# Altium PCB JacdacBreadboardRingsWasherG 109 D-shaped-panel.PcbDoc
Units mm, origin at the board's own origin, x right, y up, seen from the top; angles counter-clockwise.
Board outline 72.5 x 72 mm, 2 copper layers (Top Layer, Bottom Layer), stack 1.971 mm thick; 4 components, 0 nets, 4 pads, 0 vias.
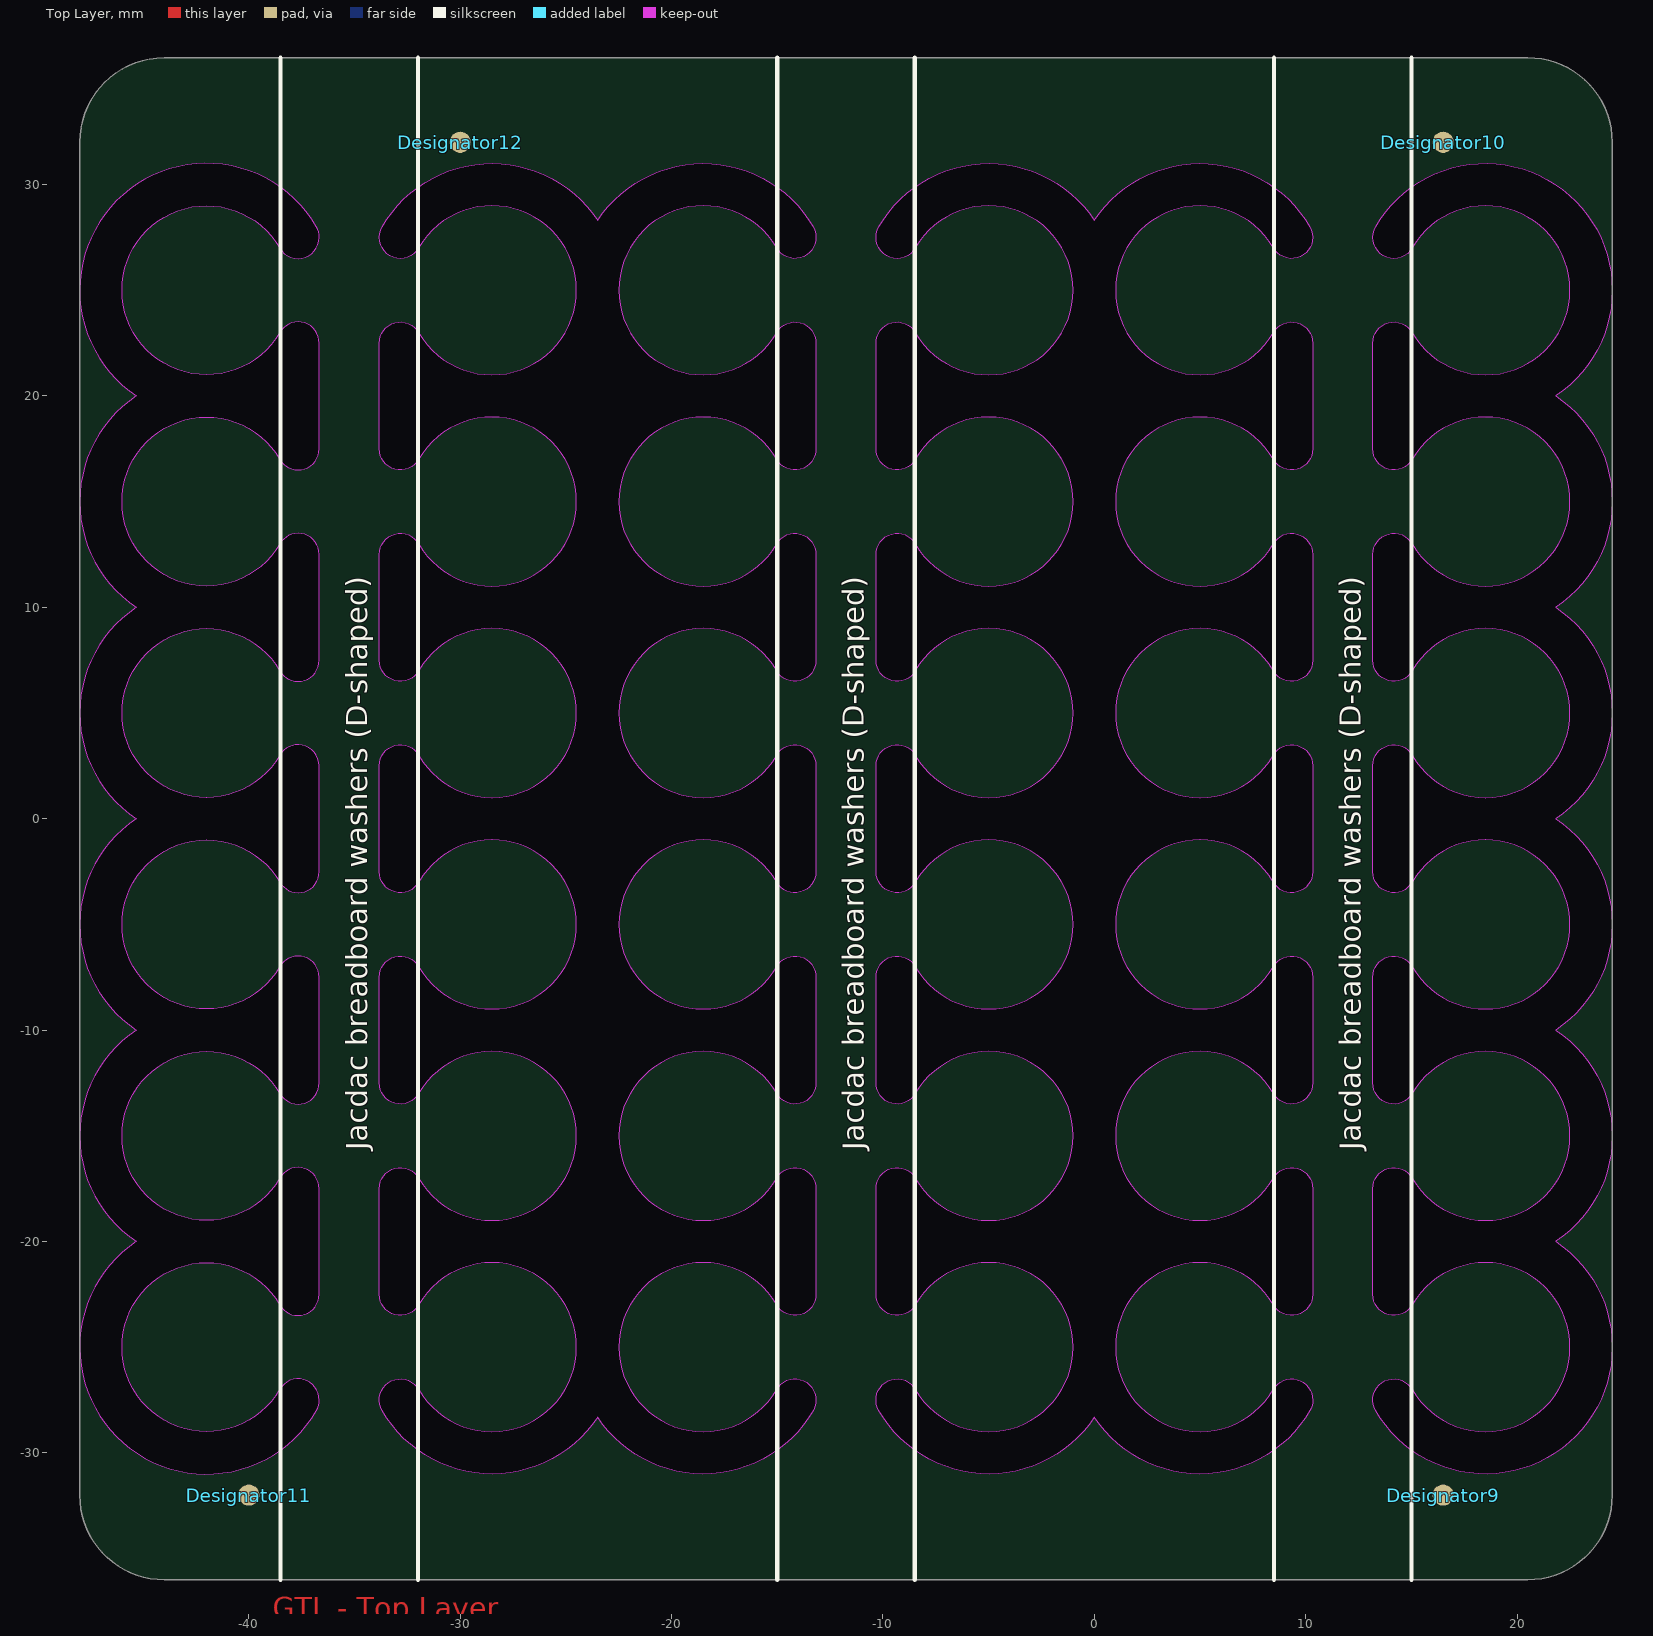
[diagram p0: Top Layer view]
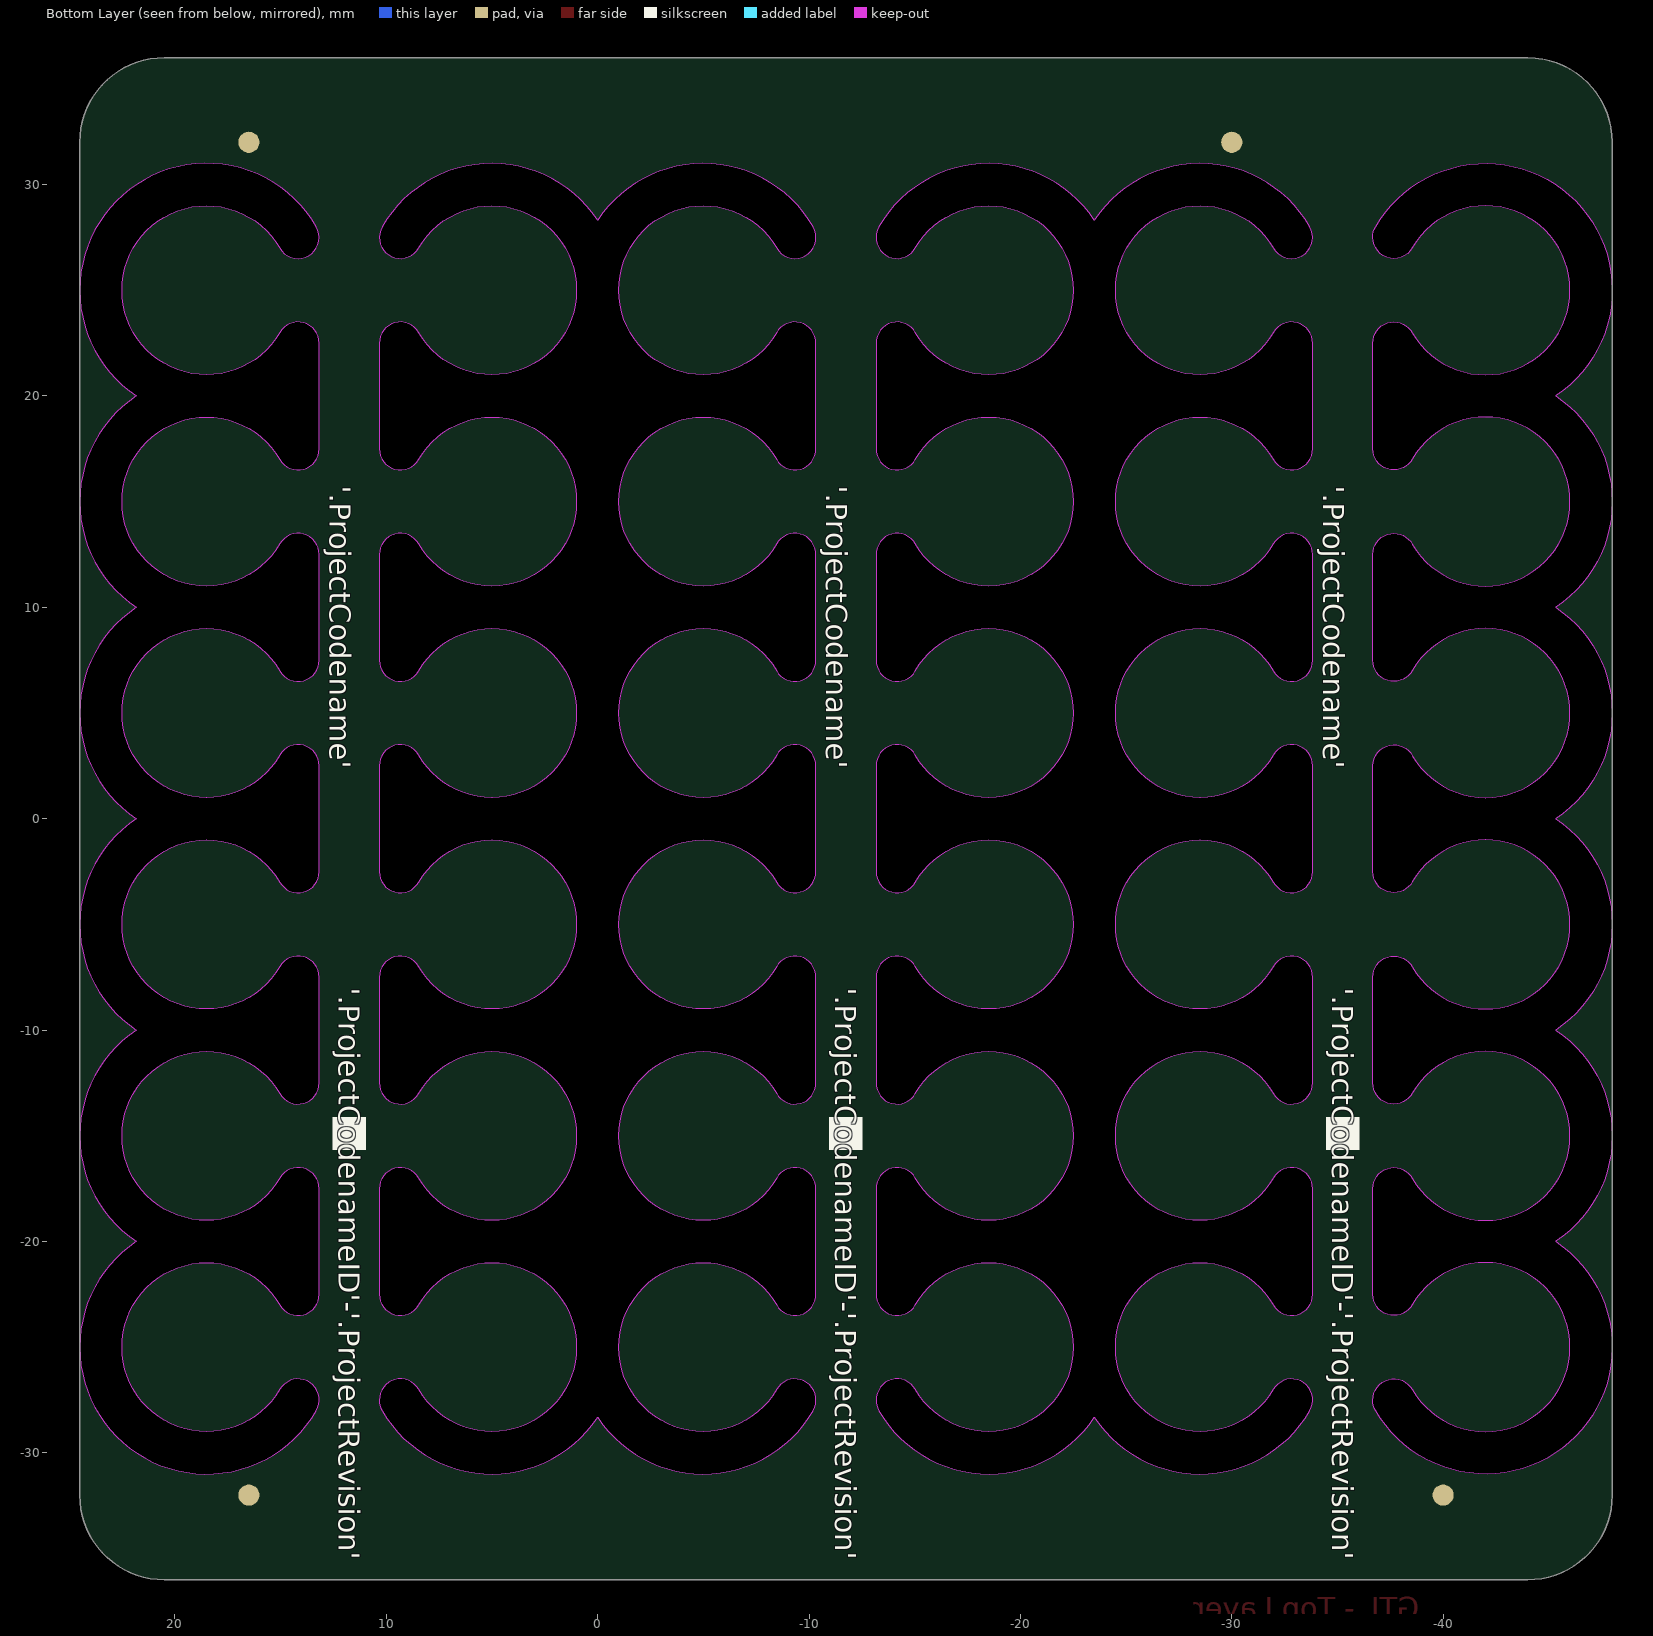
[diagram p1: Bottom Layer view, seen from below]

## Layer stack, top to bottom
Top Solder: solder mask 0.0102, Solder Resist, Dk 3.5
Top Layer: signal copper 0.0356
Dielectric 1: dielectric 1.9, FR-4, Dk 4.8
Bottom Layer: signal copper 0.0356
Bottom Solder: solder mask 0.0102, Solder Resist, Dk 3.5

## Board outline
-48,-32 ccw(c-44,-32) -44,-36 20.5,-36 ccw(c20.5,-32) 24.5,-32 24.5,32 ccw(c20.5,32) 20.5,36 -44,36 ccw(c-44,32) -48,32
cut-out: 13.169,-22.5 13.169,-17.5 cw(c14.17,-17.5) 15.037,-17.002 ccw(c18.5,-15) 18.5,-19 ccw(c18.5,-15) 22.5,-15 ccw(c18.5,-15) 18.5,-11 ccw(c18.5,-15) 15.037,-12.998 cw(c14.17,-12.5) 13.169,-12.5 13.169,-7.5 cw(c14.17,-7.5) 15.037,-7.002 ccw(c18.5,-5) 18.5,-9 ccw(c18.5,-5) 22.5,-5 ccw(c18.5,-5) 18.503,-1 18.497,-1 ccw(c18.5,-5) 15.037,-2.998 cw(c14.17,-2.5) 13.169,-2.5 13.169,2.5 cw(c14.17,2.5) 15.037,2.998 ccw(c18.5,5) 18.497,1 18.503,1 ccw(c18.5,5) 22.5,5 ccw(c18.5,5) 18.5,9 ccw(c18.5,5) 15.037,7.002 cw(c14.17,7.5) 13.169,7.5 13.169,12.5 cw(c14.17,12.5) 15.037,12.998 ccw(c18.5,15) 18.5,11 ccw(c18.5,15) 22.5,15 ccw(c18.5,15) 18.5,19 ccw(c18.5,15) 15.037,17.002 cw(c14.17,17.5) 13.169,17.5 13.169,22.5 cw(c14.17,22.5) 15.037,22.998 ccw(c18.5,25) 18.5,21 ccw(c18.5,25) 22.5,25 ccw(c18.5,25) 15.036,27 cw(c14.17,27.5) 13.304,28 cw(c18.5,25) 24.5,25 cw(c18.5,25) 21.817,20 cw(c18.5,15) 24.5,15 cw(c18.5,15) 21.817,10 cw(c18.5,5) 24.5,5 cw(c18.5,5) 21.817,0 cw(c18.5,-5) 24.5,-5 cw(c18.5,-5) 21.817,-10 cw(c18.5,-15) 24.5,-15 cw(c18.5,-15) 21.817,-20 cw(c18.5,-25) 24.5,-25 cw(c18.5,-25) 13.304,-28 cw(c14.17,-27.5) 15.036,-27 ccw(c18.5,-25) 22.5,-25 ccw(c18.5,-25) 18.5,-21 ccw(c18.5,-25) 15.037,-22.998 cw(c14.17,-22.5)
cut-out: -42,-19 cw(c-42,-15) -42,-11 cw(c-42,-15) -38.543,-12.989 ccw(c-37.67,-12.5) -37.67,-13.5 ccw(c-37.67,-12.5) -36.669,-12.5 -36.67,-12.484 -36.67,-7.516 -36.669,-7.5 ccw(c-37.67,-7.5) -37.67,-6.5 ccw(c-37.67,-7.5) -38.543,-7.011 cw(c-42,-5) -42,-9 cw(c-42,-5) -42.003,-1 -41.997,-1 cw(c-42,-5) -38.543,-2.989 ccw(c-37.67,-2.5) -37.67,-3.5 ccw(c-37.67,-2.5) -36.669,-2.5 -36.67,-2.484 -36.67,2.484 -36.669,2.5 ccw(c-37.67,2.5) -37.65,3.5 ccw(c-37.67,2.5) -38.543,2.988 cw(c-42,5) -41.997,1 -42.003,1 cw(c-42,5) -42,9 cw(c-42,5) -38.543,7.011 ccw(c-37.67,7.5) -37.67,6.5 ccw(c-37.67,7.5) -36.669,7.5 -36.67,7.516 -36.67,12.484 -36.669,12.5 ccw(c-37.67,12.5) -37.67,13.5 ccw(c-37.67,12.5) -38.543,12.989 cw(c-42,15) -42,11 cw(c-42,15) -42,19 cw(c-42,15) -38.543,17.011 ccw(c-37.67,17.5) -37.67,16.5 ccw(c-37.67,17.5) -36.669,17.5 -36.67,17.516 -36.67,22.484 -36.669,22.5 ccw(c-37.67,22.5) -37.67,23.5 ccw(c-37.67,22.5) -38.543,22.989 cw(c-42,25) -42,21 cw(c-42,25) -38.536,27 ccw(c-37.67,27.5) -36.669,27.5 ccw(c-37.67,27.5) -36.804,28 ccw(c-42,25) -45.317,20 ccw(c-42,15) -45.317,10 ccw(c-42,5) -45.317,0 ccw(c-42,-5) -45.317,-10 ccw(c-42,-15) -45.317,-20 ccw(c-42,-25) -36.804,-28 ccw(c-37.67,-27.5) -36.669,-27.5 ccw(c-37.67,-27.5) -38.536,-27 cw(c-42,-25) -42,-21 cw(c-42,-25) -38.543,-22.989 ccw(c-37.67,-22.5) -37.67,-23.5 ccw(c-37.67,-22.5) -36.669,-22.5 -36.67,-22.484 -36.67,-17.516 -36.669,-17.5 ccw(c-37.67,-17.5) -37.67,-16.5 ccw(c-37.67,-17.5) -38.543,-17.011 cw(c-42,-15)
cut-out: -10.331,-17.5 cw(c-9.33,-17.5) -8.463,-17.002 ccw(c-5,-15) -5,-19 ccw(c-5,-15) -1,-15 ccw(c-5,-15) -5,-11 ccw(c-5,-15) -8.463,-12.998 cw(c-9.33,-12.5) -10.331,-12.5 -10.331,-7.5 cw(c-9.33,-7.5) -8.463,-7.002 ccw(c-5,-5) -5,-9 ccw(c-5,-5) -1,-5 ccw(c-5,-5) -4.997,-1 -5.003,-1 ccw(c-5,-5) -8.463,-2.998 cw(c-9.33,-2.5) -10.331,-2.5 -10.331,2.5 cw(c-9.33,2.5) -8.463,2.998 ccw(c-5,5) -5.003,1 -4.997,1 ccw(c-5,5) -1,5 ccw(c-5,5) -5,9 ccw(c-5,5) -8.463,7.002 cw(c-9.33,7.5) -10.331,7.5 -10.331,12.5 cw(c-9.33,12.5) -8.463,12.998 ccw(c-5,15) -5,11 ccw(c-5,15) -1,15 ccw(c-5,15) -5,19 ccw(c-5,15) -8.463,17.002 cw(c-9.33,17.5) -10.331,17.5 -10.331,22.5 cw(c-9.33,22.5) -8.463,22.998 ccw(c-5,25) -5,21 ccw(c-5,25) -1,25 ccw(c-5,25) -8.464,27 cw(c-9.33,27.5) -10.196,28 cw(c-5,25) 0,28.317 cw(c5,25) 10.196,28 cw(c9.33,27.5) 10.331,27.5 cw(c9.33,27.5) 8.464,27 ccw(c5,25) 1,25 ccw(c5,25) 5,21 ccw(c5,25) 8.463,22.998 cw(c9.33,22.5) 10.331,22.5 10.331,17.5 cw(c9.33,17.5) 8.463,17.002 ccw(c5,15) 5,19 ccw(c5,15) 1,15 ccw(c5,15) 5,11 ccw(c5,15) 8.463,12.998 cw(c9.33,12.5) 10.331,12.5 10.331,7.5 cw(c9.33,7.5) 8.463,7.002 ccw(c5,5) 5,9 ccw(c5,5) 1,5 ccw(c5,5) 4.997,1 5.003,1 ccw(c5,5) 8.463,2.998 cw(c9.33,2.5) 10.331,2.5 10.331,-2.5 cw(c9.33,-2.5) 8.463,-2.998 ccw(c5,-5) 5.003,-1 4.997,-1 ccw(c5,-5) 1,-5 ccw(c5,-5) 5,-9 ccw(c5,-5) 8.463,-7.002 cw(c9.33,-7.5) 10.331,-7.5 10.331,-12.5 cw(c9.33,-12.5) 8.463,-12.998 ccw(c5,-15) 5,-11 ccw(c5,-15) 1,-15 ccw(c5,-15) 5,-19 ccw(c5,-15) 8.463,-17.002 cw(c9.33,-17.5) 10.331,-17.5 10.331,-22.5 cw(c9.33,-22.5) 8.463,-22.998 ccw(c5,-25) 5,-21 ccw(c5,-25) 1,-25 ccw(c5,-25) 8.464,-27 cw(c9.33,-27.5) 10.331,-27.5 cw(c9.33,-27.5) 10.196,-28 cw(c5,-25) 0,-28.317 cw(c-5,-25) -10.196,-28 cw(c-9.33,-27.5) -8.464,-27 ccw(c-5,-25) -1,-25 ccw(c-5,-25) -5,-21 ccw(c-5,-25) -8.463,-22.998 cw(c-9.33,-22.5) -10.331,-22.5
cut-out: -33.831,-17.5 cw(c-32.83,-17.5) -31.963,-17.002 ccw(c-28.5,-15) -28.5,-19 ccw(c-28.5,-15) -24.5,-15 ccw(c-28.5,-15) -28.5,-11 ccw(c-28.5,-15) -31.963,-12.998 cw(c-32.83,-12.5) -33.831,-12.5 -33.831,-7.5 cw(c-32.83,-7.5) -31.963,-7.002 ccw(c-28.5,-5) -28.5,-9 ccw(c-28.5,-5) -24.5,-5 ccw(c-28.5,-5) -28.497,-1 -28.503,-1 ccw(c-28.5,-5) -31.963,-2.998 cw(c-32.83,-2.5) -33.831,-2.5 -33.831,2.5 cw(c-32.83,2.5) -31.963,2.998 ccw(c-28.5,5) -28.503,1 -28.497,1 ccw(c-28.5,5) -24.5,5 ccw(c-28.5,5) -28.5,9 ccw(c-28.5,5) -31.963,7.002 cw(c-32.83,7.5) -33.831,7.5 -33.831,12.5 cw(c-32.83,12.5) -31.963,12.998 ccw(c-28.5,15) -28.5,11 ccw(c-28.5,15) -24.5,15 ccw(c-28.5,15) -28.5,19 ccw(c-28.5,15) -31.963,17.002 cw(c-32.83,17.5) -33.831,17.5 -33.831,22.5 cw(c-32.83,22.5) -31.963,22.998 ccw(c-28.5,25) -28.5,21 ccw(c-28.5,25) -24.5,25 ccw(c-28.5,25) -31.964,27 cw(c-32.83,27.5) -33.696,28 cw(c-28.5,25) -23.5,28.317 cw(c-18.5,25) -13.304,28 cw(c-14.17,27.5) -13.169,27.5 cw(c-14.17,27.5) -15.036,27 ccw(c-18.5,25) -22.5,25 ccw(c-18.5,25) -18.5,21 ccw(c-18.5,25) -15.037,22.998 cw(c-14.17,22.5) -13.169,22.5 -13.169,17.5 cw(c-14.17,17.5) -15.037,17.002 ccw(c-18.5,15) -18.5,19 ccw(c-18.5,15) -22.5,15 ccw(c-18.5,15) -18.5,11 ccw(c-18.5,15) -15.037,12.998 cw(c-14.17,12.5) -13.169,12.5 -13.169,7.5 cw(c-14.17,7.5) -15.037,7.002 ccw(c-18.5,5) -18.5,9 ccw(c-18.5,5) -22.5,5 ccw(c-18.5,5) -18.503,1 -18.497,1 ccw(c-18.5,5) -15.037,2.998 cw(c-14.17,2.5) -13.169,2.5 -13.169,-2.5 cw(c-14.17,-2.5) -15.037,-2.998 ccw(c-18.5,-5) -18.497,-1 -18.503,-1 ccw(c-18.5,-5) -22.5,-5 ccw(c-18.5,-5) -18.5,-9 ccw(c-18.5,-5) -15.037,-7.002 cw(c-14.17,-7.5) -13.169,-7.5 -13.169,-12.5 cw(c-14.17,-12.5) -15.037,-12.998 ccw(c-18.5,-15) -18.5,-11 ccw(c-18.5,-15) -22.5,-15 ccw(c-18.5,-15) -18.5,-19 ccw(c-18.5,-15) -15.037,-17.002 cw(c-14.17,-17.5) -13.169,-17.5 -13.169,-22.5 cw(c-14.17,-22.5) -15.037,-22.998 ccw(c-18.5,-25) -18.5,-21 ccw(c-18.5,-25) -22.5,-25 ccw(c-18.5,-25) -15.036,-27 cw(c-14.17,-27.5) -13.169,-27.5 cw(c-14.17,-27.5) -13.304,-28 cw(c-18.5,-25) -23.5,-28.317 cw(c-28.5,-25) -33.696,-28 cw(c-32.83,-27.5) -31.964,-27 ccw(c-28.5,-25) -24.5,-25 ccw(c-28.5,-25) -28.5,-21 ccw(c-28.5,-25) -31.963,-22.998 cw(c-32.83,-22.5) -33.831,-22.5

## Design rules (kind name [scope] priority, off if disabled: settings)
Clearance [All] p1: gap=0.254 ignorepadtopadclearanceinfootprint=FALSE except(0: Arc-Hole Track-Hole SMDPad-Hole THPad-Hole Via-Hole Fill-Hole Poly-Hole Region-Hole Text-Hole)
PolygonConnect [All] p1: connectstyle=Relief reliefconductorwidth=0.254 reliefentries=4 polygonreliefangle="90 Angle" airgapwidth=0.254
RoutingVias [All] p1: holewidth=0.711 width=1.27 viastyle="Through Hole" minholewidth=0.711 minwidth=1.27 maxholewidth=0.711 maxwidth=1.27
SolderMaskExpansion [All] p1: expansion=0.102 istentingtop=FALSE
Width [All] p1: maxlimit=0.254 minlimit=0.254 preferedwidth=0.254
30 further rules are at their usual default settings.

## Components (designator, comment, footprint, x,y, rotation, side; value= is the part's Value field where it differs from the comment)
Designator9 "Comment" "Pad1mm soldermask2mm doublesided" 16.5,-32 r0 top
Designator10 "Comment" "Pad1mm soldermask2mm doublesided" 16.5,32 r0 top
Designator11 "Comment" "Pad1mm soldermask2mm doublesided" -40,-32 r180 top
Designator12 "Comment" "Pad1mm soldermask2mm doublesided" -30,32 r180 top

## Footprints (in the part's own frame and the unit in brackets; to place one, negate y for a bottom-side part, rotate by r counter-clockwise, add the part's x,y. Pads: shape width x height; smd on the part's side, far side on the other; paste and mask are expansions set on the pad)
"Pad1mm soldermask2mm doublesided" [mm] "Testpoint/fiducial pad 1mm diameter with 2mm diameter soldermask"
  round 1 all layers, no hole paste-1 mask+0.5: 1(0,0)

## Nets (pads, with @x,y where several pads share a name; then routed paths per layer and width w, separated by ;. In a path a pad name is that pad's centre, name@x,y a point inside that pad or via, vN(x,y) a via of type N, cw(c..) or ccw(c..) an arc to the next point about the centre after c; other vN are vias at no path point)
pads on no net: Designator9.1 Designator10.1 Designator11.1 Designator12.1

## Other copper
Top Layer:
  text "GTL - Top Layer" at -38.872,-38.151 h1.7
Bottom Layer:
  text "GBL - Bottom Layer" at -38.872,-39.651 h1.7

## Silkscreen, mask and mechanical layers (free items; w line width, h text height)
Top Overlay:
  lines w0.2: -38.5,-36 -38.5,36 ; -32,-36 -32,36 ; -15,-36 -15,36 ; -8.5,-36 -8.5,36 ; 8.5,-36 8.5,36 ; 15,-36 15,36
  text "Jacdac breadboard washers (D-shaped)" at -34.4,-15.687 h1 r90
  text "Jacdac breadboard washers (D-shaped)" at -10.9,-15.687 h1 r90
  text "Jacdac breadboard washers (D-shaped)" at 12.6,-15.687 h1 r90
  text "GTO - Top Overlay" at -23.372,-41.187 h1.7
Bottom Overlay:
  region: -34.45,-15.675 -34.45,-14.1 -36.042,-14.1 -36.042,-15.675
  region: -10.95,-15.675 -10.95,-14.1 -12.542,-14.1 -12.542,-15.675
  region: 12.55,-15.675 12.55,-14.1 10.958,-14.1 10.958,-15.675
  text "'.ProjectCodename'" at -34.325,15.752 h1 r90
  text "'.ProjectCodename'" at -10.825,15.752 h1 r90
  text "'.ProjectCodename'" at 12.675,15.752 h1 r90
  text "'.ProjectCodenameID'-'.ProjectRevision'" at -34.75,-8 h1 r90
  text "'.ProjectCodenameID'-'.ProjectRevision'" at -11.25,-8 h1 r90
  text "'.ProjectCodenameID'-'.ProjectRevision'" at 12.25,-8 h1 r90
  text "GBO - Bottom Overlay" at -23.372,-42.687 h1.7
Top Paste:
  text "GTP - Top Paste" at -9.172,-38.151 h1.7
Bottom Paste:
  text "GBP - Bottom Paste" at -9.172,-39.651 h1.7
Top Solder:
  text "GTS - Top Solder (resist)" at -9.172,-41.187 h1.7
Bottom Solder:
  text "GBS - Bottom Solder (resist)" at -9.172,-42.687 h1.7
[3] Fabrication Notes:
  text "GTL - Top Layer" at 25.501,29.093 h1.7
  text "GBL - Bottom Layer" at 25.501,27.593 h1.7
  text "GTO - Top Overlay" at 25.501,26.057 h1.7
  text "GBO - Bottom Overlay" at 25.501,24.557 h1.7
  text "GTP - Top Paste" at 25.501,23.093 h1.7
  text "GBP - Bottom Paste" at 25.501,21.593 h1.7
  text "GTS - Top Solder (resist)" at 25.501,20.057 h1.7
  text "GBS - Bottom Solder (resist)" at 25.501,18.557 h1.7
  text "GM3 - Fabrication Notes" at 25.501,17.057 h1.7
  text "GM6 - Board Outline Only" at 25.501,15.557 h1.7
  text "GM9 - V Score" at 25.501,14.093 h1.7
  text "GM11 - Board Outline + Cutouts" at 25.501,12.557 h1.7
  text "GM15 - Top Assy" at 25.501,11.088 h1.7
  text "GM16 - Bottom Assy" at 25.501,9.588 h1.7
  text "Copper up to cutout / edge at customer risk /  / No solder resist or / silk on bottom layer /  / Green solder resist on top /  / Note V-score lines on GM9 / (also indicated on top silk)" at 25.5,-25.699 h1.7
  text "GM3 - Fabrication Notes" at -38.872,-41.187 h1.7
Board Outline Only:
  the board outline again, w0.2
  text "GM6 - Board Outline Only" at -38.872,-42.686 h1.7
[9] V Score:
  lines w0.2: -38.5,-36 -38.5,36 ; -32,-36 -32,36 ; -15,-36 -15,36 ; -8.5,-36 -8.5,36 ; 8.5,-36 8.5,36 ; 15,-36 15,36
  text "GM9 - V Score" at -9.172,-44.15 h1.7
[11] Board Outline:
  lines w0.2: -48,-32 ccw(c-44,-32) -44,-36 20.5,-36 ccw(c20.5,-32) 24.5,-32 24.5,32 ccw(c20.5,32) 20.5,36 -44,36 ccw(c-44,32) -48,32 -48,-32
  lines w2: -37.67,-27.5 cw(c-42,-25) -37.67,-22.5 -37.67,-17.5 cw(c-42,-15) -37.67,-12.5 -37.67,-7.5 cw(c-42,-5) -37.67,-2.5 -37.67,2.5 cw(c-42,5) -37.67,7.5 -37.67,12.5 cw(c-42,15) -37.67,17.5 -37.67,22.5 cw(c-42,25) -37.67,27.5 ; -32.83,-27.5 ccw(c-28.5,-25) -32.83,-22.5 -32.83,-17.5 ccw(c-28.5,-15) -32.83,-12.5 -32.83,-7.5 ccw(c-28.5,-5) -32.83,-2.5 -32.83,2.5 ccw(c-28.5,5) -32.83,7.5 -32.83,12.5 ccw(c-28.5,15) -32.83,17.5 -32.83,22.5 ccw(c-28.5,25) -32.83,27.5 ; -14.17,-27.5 cw(c-18.5,-25) -14.17,-22.5 -14.17,-17.5 cw(c-18.5,-15) -14.17,-12.5 -14.17,-7.5 cw(c-18.5,-5) -14.17,-2.5 -14.17,2.5 cw(c-18.5,5) -14.17,7.5 -14.17,12.5 cw(c-18.5,15) -14.17,17.5 -14.17,22.5 cw(c-18.5,25) -14.17,27.5 ; -9.33,-27.5 ccw(c-5,-25) -9.33,-22.5 -9.33,-17.5 ccw(c-5,-15) -9.33,-12.5 -9.33,-7.5 ccw(c-5,-5) -9.33,-2.5 -9.33,2.5 ccw(c-5,5) -9.33,7.5 -9.33,12.5 ccw(c-5,15) -9.33,17.5 -9.33,22.5 ccw(c-5,25) -9.33,27.5 ; 9.33,-27.5 cw(c5,-25) 9.33,-22.5 9.33,-17.5 cw(c5,-15) 9.33,-12.5 9.33,-7.5 cw(c5,-5) 9.33,-2.5 9.33,2.5 cw(c5,5) 9.33,7.5 9.33,12.5 cw(c5,15) 9.33,17.5 9.33,22.5 cw(c5,25) 9.33,27.5 ; 14.17,-27.5 ccw(c18.5,-25) 14.17,-22.5 14.17,-17.5 ccw(c18.5,-15) 14.17,-12.5 14.17,-7.5 ccw(c18.5,-5) 14.17,-2.5 14.17,2.5 ccw(c18.5,5) 14.17,7.5 14.17,12.5 ccw(c18.5,15) 14.17,17.5 14.17,22.5 ccw(c18.5,25) 14.17,27.5
  text "GM11 - Board Outline + Cutouts" at -38.872,-44.186 h1.7
[15] Top Assy:
  text "GM15 - Top Assy" at -23.372,-38.155 h1.7
[16] Bottom Assy:
  text "GM16 - Bottom Assy" at -23.372,-39.655 h1.7

## Panel: embedded boards
"y:\Projects\JacdacGeneric\Altium\JacdacBreadboardRingsWasherG 109\JacdacBreadboardRingsWasherG 109 D-shaped.PcbDoc" at -32,-29, 1 rows x 3 columns, spacing 30 x 23.5, rotation 0